# Altium PCB PCB layout.PcbDoc
Units mil, origin at the board's own origin, x right, y up, seen from the top; angles counter-clockwise.
Board outline 1995 x 1900 mil, 2 copper layers (Top Layer, Bottom Layer); 18 components, 21 nets, 82 pads, 0 vias.
Unrouted connection lines stored in the file: 1.
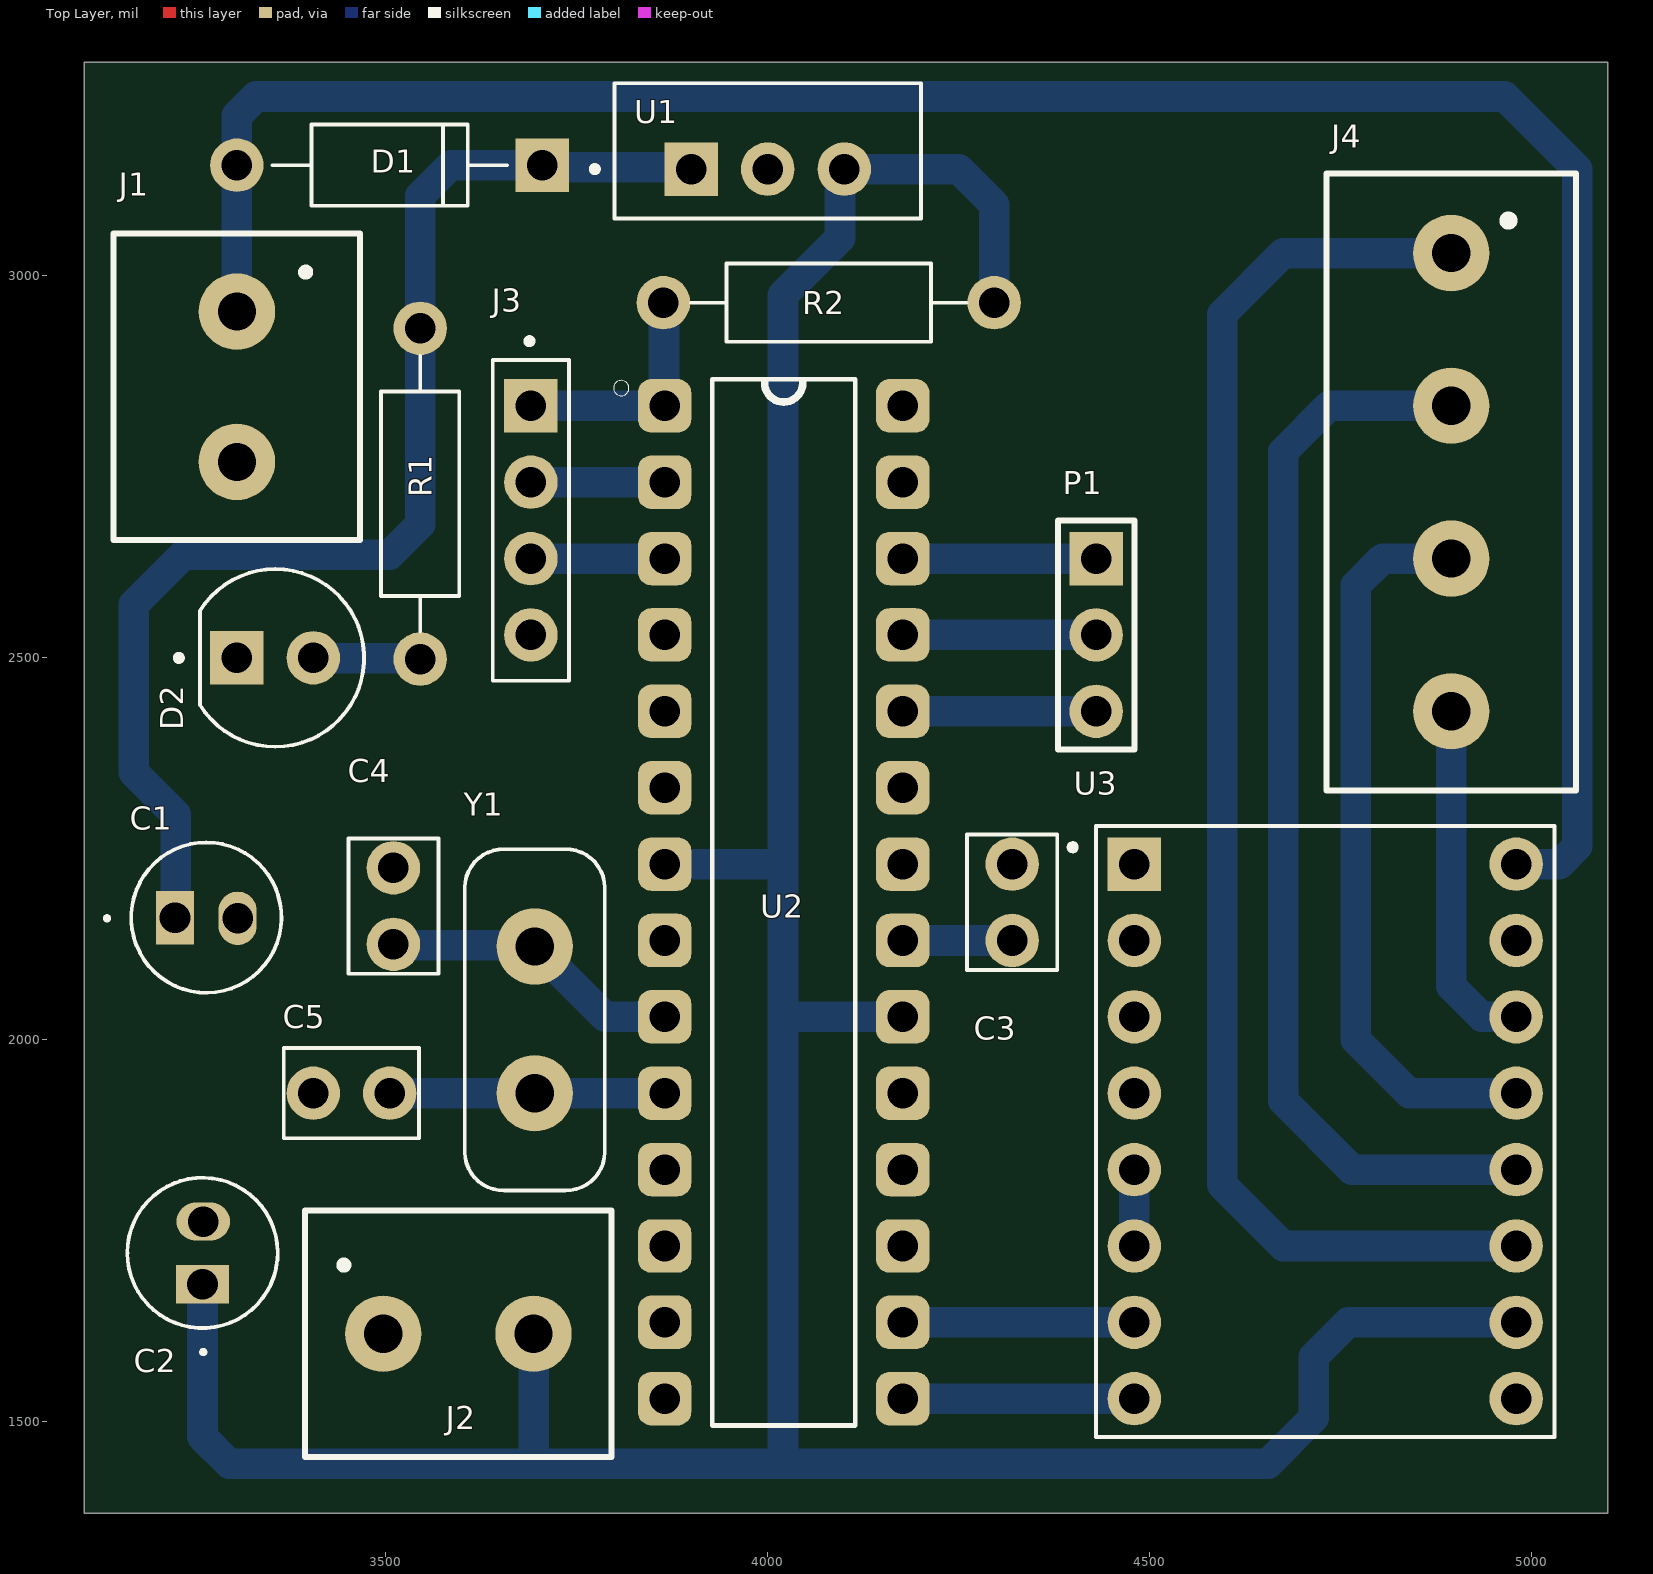
[diagram p0: Top Layer view]
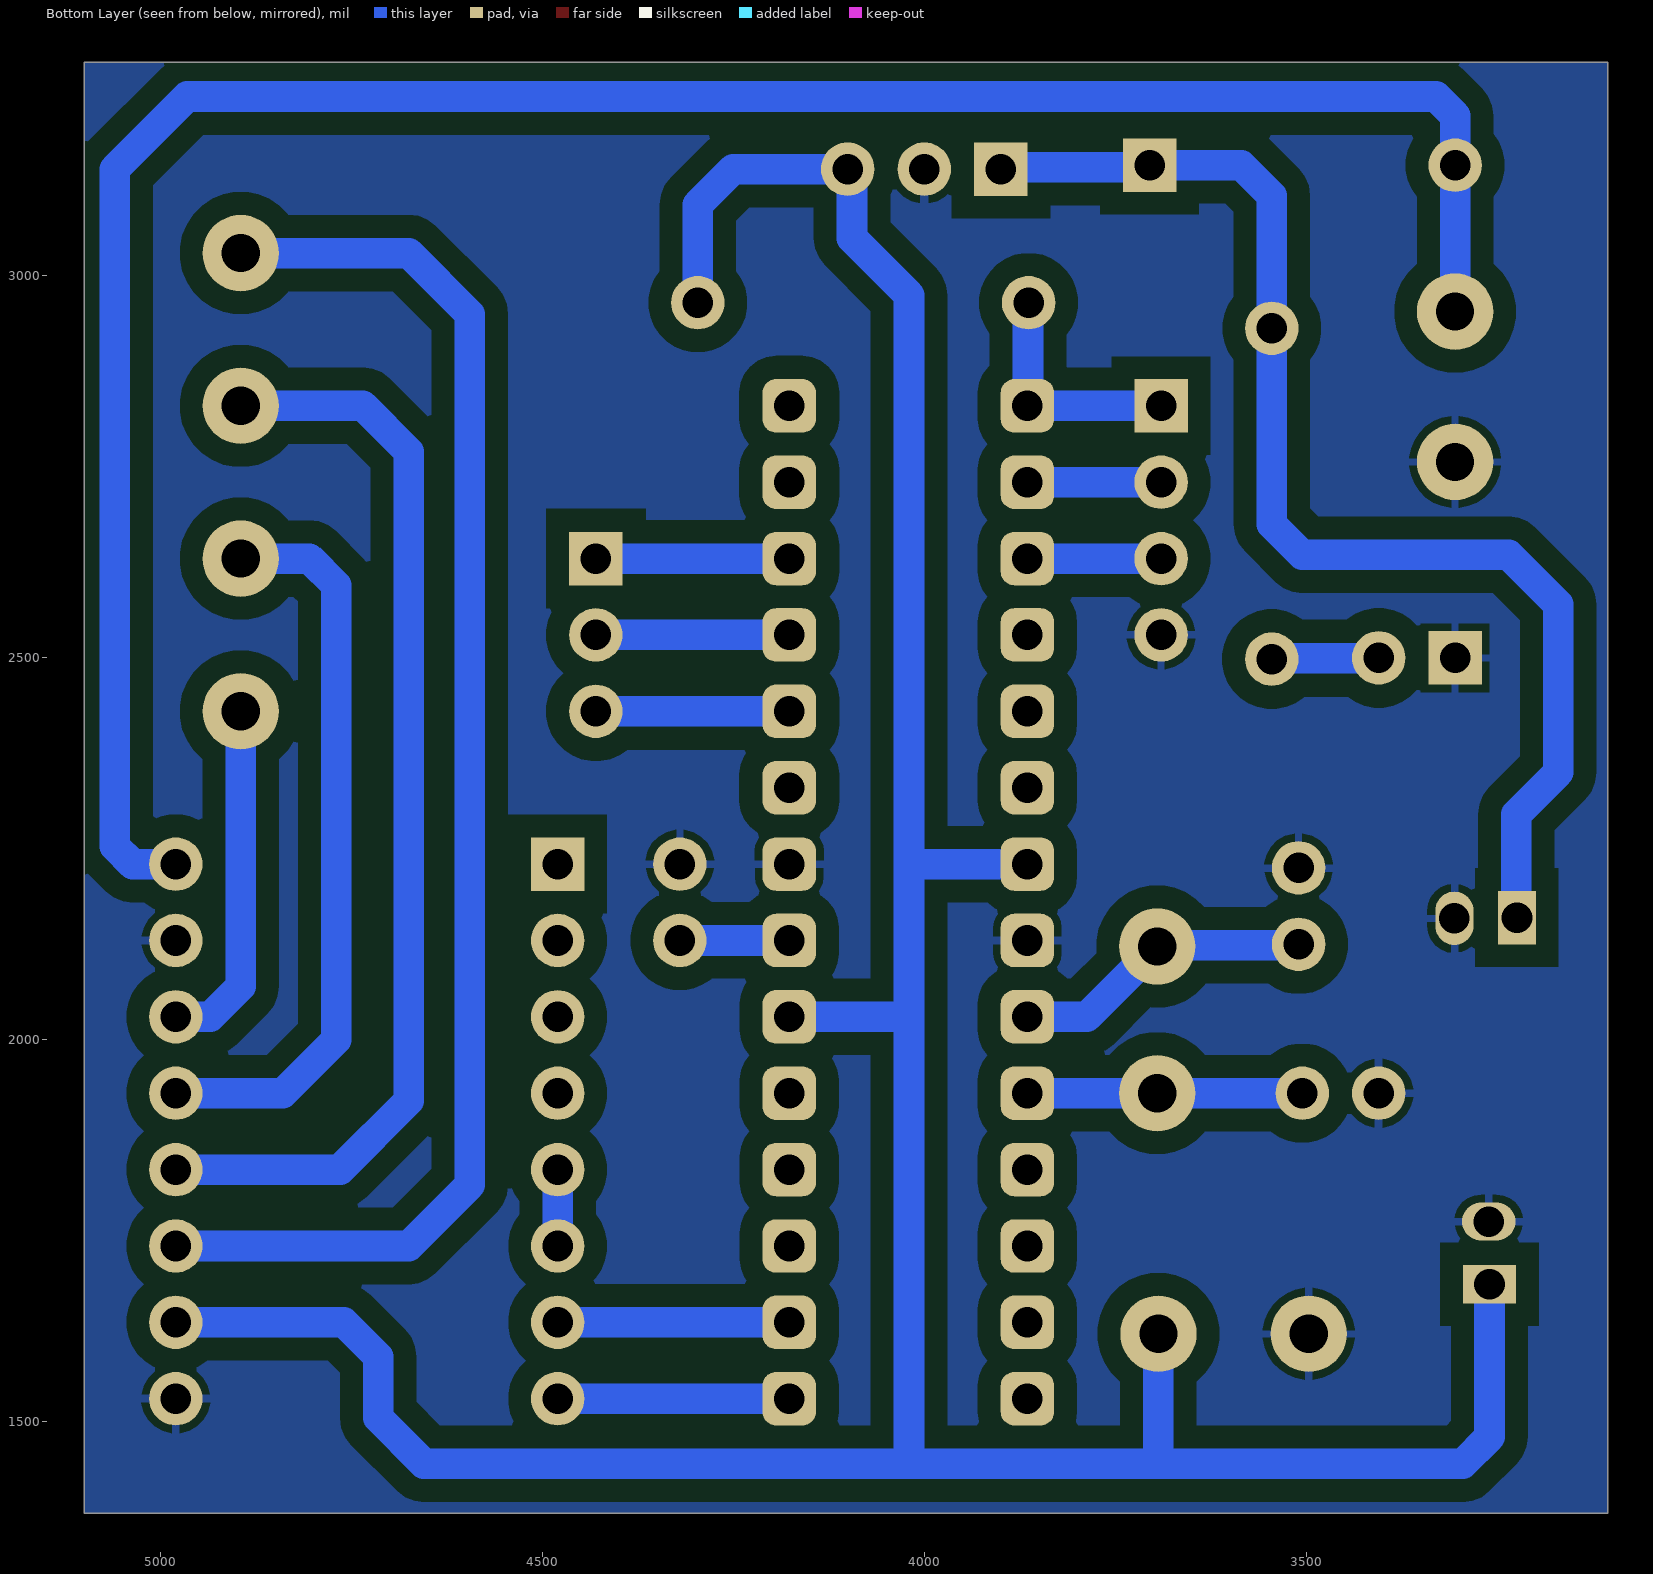
[diagram p1: Bottom Layer view, seen from below]
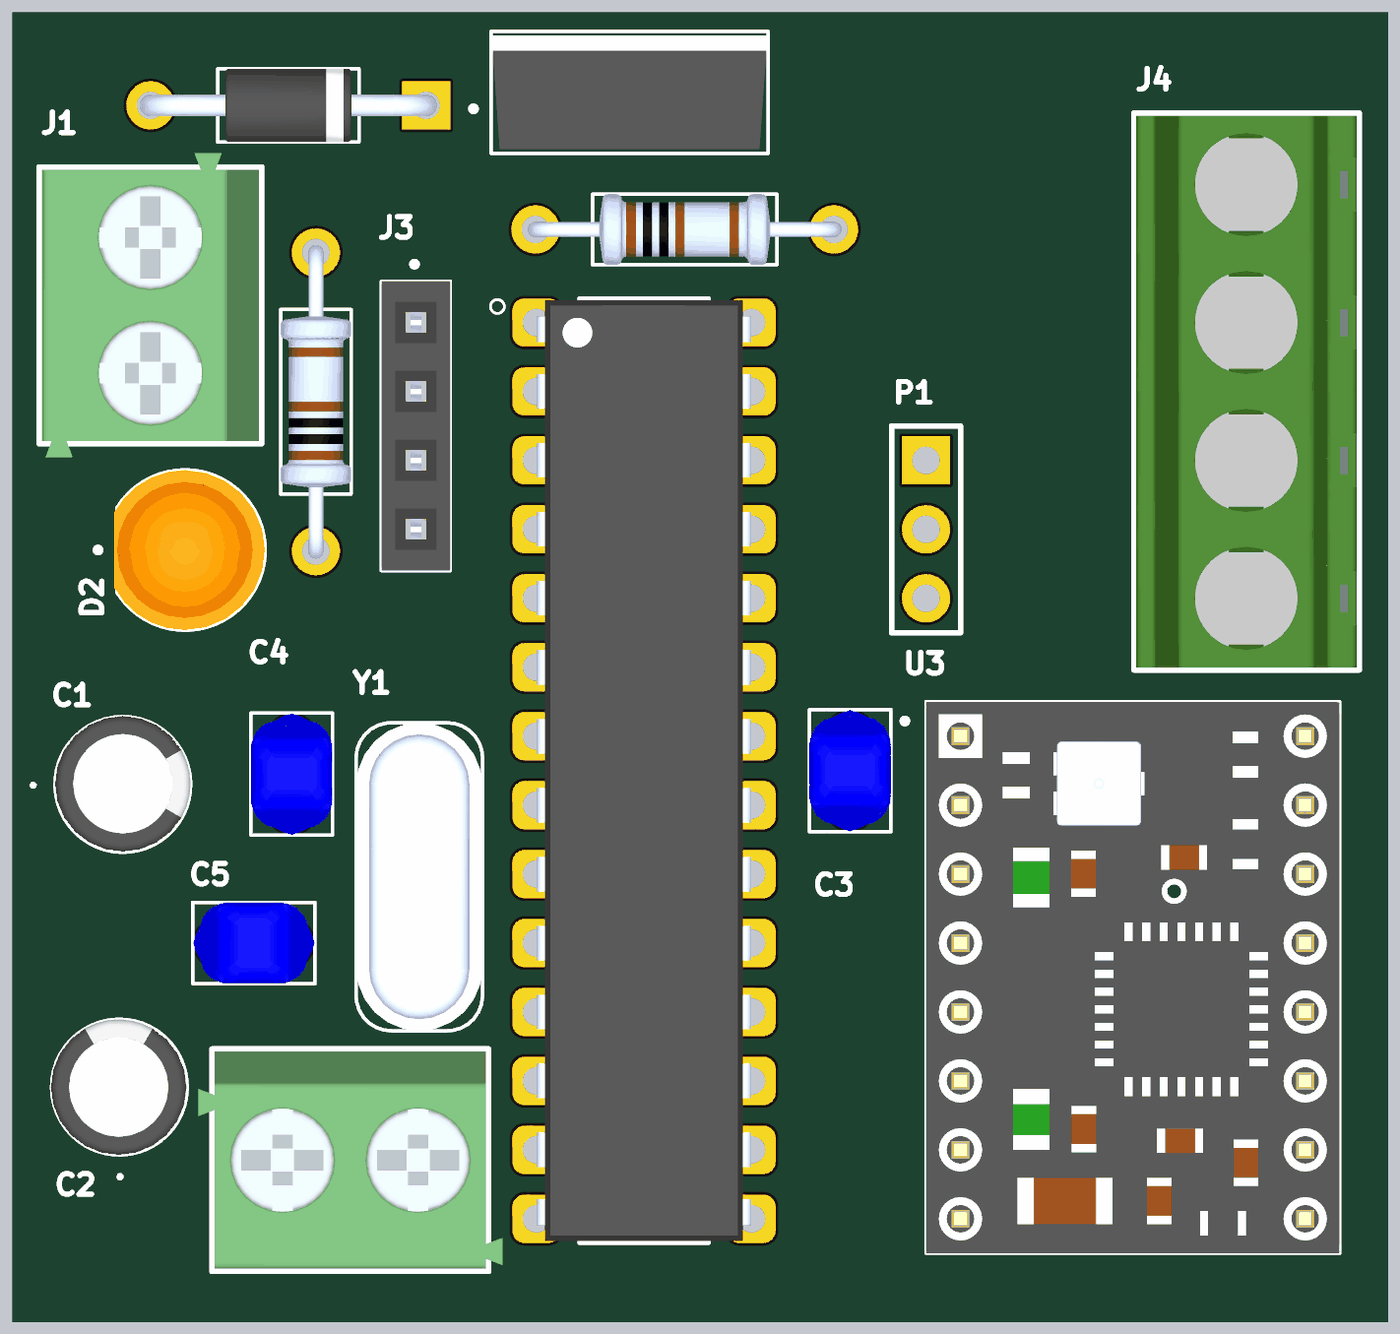
[diagram p2: 3D render of the assembled board from above, using the file's embedded part models]

## Layer stack, top to bottom
Top Solder: solder mask 0.4, Solder Resist, Dk 3.5
Top Layer: signal copper 1.4
Dielectric 1: dielectric 12.6, FR-4, Dk 4.8
Bottom Layer: signal copper 1.4
Bottom Solder: solder mask 0.4, Solder Resist, Dk 3.5

## Board outline
3105,1380 5100,1380 5100,3280 3105,3280

## Design rules (kind name [scope] priority, off if disabled: settings)
Clearance [All] p1: gap=30 ignorepadtopadclearanceinfootprint=FALSE
PolygonConnect [All] p1: connectstyle=Relief reliefconductorwidth=10 reliefentries=4 polygonreliefangle="90 Angle" airgapwidth=10
RoutingVias [All] p1: holewidth=40 width=70 viastyle="Through Hole" minholewidth=40 minwidth=70 maxholewidth=40 maxwidth=70
SolderMaskExpansion [All] p1: expansion=4 istentingtop=FALSE
Width [All] p1: maxlimit=60 minlimit=40 preferedwidth=50
30 further rules are at their usual default settings.

## Components (designator, comment, footprint, x,y, rotation, side; value= is the part's Value field where it differs from the comment)
C1 "100uF" CAPPRD500W50D500H1100 3265,2160 r0 top
C2 "10uF" CAPPRD500W50D500H1100 3260,1721 r90 top
C3 "100nF" CAPRB500W50L450T300H550 4320,2130 r90 top
C4 "22pF" CAPRB500W50L450T300H550 3510,2125 r90 top
C5 "22pF" CAPRB500W50L450T300H550 3505,1930 r180 top
D1 "1N4007" DIOAD1060W80L520D270 3505,3145 r180 top
D2 "L08R5000Q1" LEDRD254W57D500H1070 3355,2500 r0 top
J1 "691111710002" 691111710002 3305,2855 r270 top
J2 "691111710002" 691111710002 3595,1615 r0 top
J3 "PPTC041LFBN-RC" SULLINS_PPTC041LFBN-RC 3690,2680 r270 top
J4 "691241510004" 691241510004 4895,2730 r270 top
P1 "Header 3" HDR1X3 4430,2630 r270 top
R1 "1k" RESAD1100W55L680D260 3545,2715 r270 top
R2 "10k" RESAD1100W55L680D260 4080,2965 r180 top
U1 "LM7805" TO255P1020X450X1968-3 4000,3163.82 r0 top
U2 "ATMEGA328P-PU" DIP794W46P254L2967H457Q28B 4020.91,2180 r0 top
U3 "A4988" MODULE_A4988_STEPPER_MOTOR_DRIVER_CARRIER 4730,1880 r0 top
Y1 "16MHz" XTAL_ECS-160-20-4X 3695,2026.06 r270 top

## Footprints (in the part's own frame and the unit in brackets; to place one, negate y for a bottom-side part, rotate by r counter-clockwise, add the part's x,y. Pads: shape width x height; smd on the part's side, far side on the other; paste and mask are expansions set on the pad)
691111710002 [mm]
  round 2.54 hole 1.27: 1(-2.5,0) 2(2.5,0)
  silkscreen extent -5.1,-4.1 5.1,4.1, body extent -5.6,-4 5.6,4, height 11.01
691241510004 [mil]
  round 100 hole 50 mask+0: 1(-300,0) 2(-100,0) 3(100,0) 4(300,0)
  silkscreen extent -404,-163 404,163, body extent -400,-160 400,159, height 394
CAPPRD500W50D500H1100 [mil]
  oval 50x70 hole 40: N(41,-1)
  rect 50x70 hole 40: P(-41,0)
  silkscreen extent -131,-98 98,98, body extent -108,-97 108,99, height 434
CAPRB500W50L450T300H550 [mil]
  round 70 hole 40: 1(0,0) 2(100,0)
  silkscreen extent -39,-59 139,59, body extent -38,-59 138,59, height 210
DIOAD1060W80L520D270 [mil]
  round 70 hole 40: A(200,0)
  rect 70x70 hole 40: C(-200,0)
  silkscreen extent -154,-53 154,53, body extent -216,-53 216,53, height 99
DIP794W46P254L2967H457Q28B [mil]
  rrect50% 70x70 hole 40: 1(-155.91,650) 2(-155.91,550) 3(-155.91,450) 4(-155.91,350) 5(-155.91,250) 6(-155.91,150) 7(-155.91,50) 8(-155.91,-50) 9(-155.91,-150) 10(-155.91,-250) 11(-155.91,-350) 12(-155.91,-450) 13(-155.91,-550) 14(-155.91,-650) 15(155.91,-650) 16(155.91,-550) 17(155.91,-450) 18(155.91,-350) 19(155.91,-250) 20(155.91,-150) 21(155.91,-50) 22(155.91,50) 23(155.91,150) 24(155.91,250) 25(155.91,350) 26(155.91,450) 27(155.91,550) 28(155.91,650)
  silkscreen extent -223,-685 94,685, body extent -156,-682 156,683, height 180
HDR1X3 [mil] "Connector; Header; 3 Position"
  rect 70x70 hole 40: 1(0,0)
  round 70 hole 40: 2(100,0) 3(200,0)
  silkscreen extent -50,-50 250,50
LEDRD254W57D500H1070 [mil]
  round 70 hole 40: A(50,0)
  rect 70x70 hole 40: C(-50,0)
  silkscreen extent -130,-116 116,116, body extent -102,-116 116,116, height 358
MODULE_A4988_STEPPER_MOTOR_DRIVER_CARRIER [mil]
  rect 70x70 hole 40: 1(-250,350)
  round 70 hole 40: 2(-250,250) 3(-250,150) 4(-250,50) 5(-250,-50) 6(-250,-150) 7(-250,-250) 8(-250,-350) 9(250,-350) 10(250,-250) 11(250,-150) 12(250,-50) 13(250,50) 14(250,150) 15(250,250) 16(250,350)
  silkscreen extent -335,-400 300,400, body extent -300,-400 300,400, height 233
RESAD1100W55L680D260 [mil]
  round 70 hole 40: 1(-216.54,0) 2(216.54,0)
  silkscreen extent -180,-51 180,51, body extent -227,-51 227,51, height 101
SULLINS_PPTC041LFBN-RC [mil]
  rect 70x70 hole 40: 1(-150,0)
  round 70 hole 40: 2(-50,0) 3(50,0) 4(150,0)
  silkscreen extent -239,-50 210,50, body extent -210,-50 210,50, height 335
TO255P1020X450X1968-3 [mil]
  rect 70x70 hole 40: 1(-100.39,-23.82)
  round 70 hole 40: 2(0,-23.82) 3(100.39,-23.82)
  silkscreen extent -230,-89 201,89, body extent -200,-82 200,83, height 901
XTAL_ECS-160-20-4X [mm]
  round 2.54 hole 1.27: 1(-2.44,0) 2(2.44,0)
  silkscreen extent -5.68,-2.33 5.68,2.33, body extent -5.68,-2.32 5.68,2.32, height 3.5

## Part data
C1 C2: library part "Electrolytic capacitor", "FS-A", Package=None, Availability=Unavailable, MF="{'manufacturer': u'Panasonic'}", MP=EEUFS0J221B, Price=None
C3 C4 C5: library part "Ceramic capacitor", "2200 pF Â±10% 250V Ceramic Capacitor X7R Radial", Package="Radial TDK", Check_prices=https://www.snapeda.com/parts/FG24X7R2E222KNT06/TDK/view-part/?ref=eda, Digi-Key_Part_Number=445-173386-1-ND, MF=TDK, MP=FG24X7R2E222KNT06, Purchase-URL=https://pricing.snapeda.com/search/part/FG24X7R2E222KNT06/?ref=eda, SnapEDA_Link=https://www.snapeda.com/parts/FG24X7R2E222KNT06/TDK/view-part/?ref=snap
D1: "Diode Switching 1KV 1A 2-Pin DO-41", Package=None, Availability=Unavailable, MP=1N4007, Price=None
D2: library part LED, "LED, Orange, Through Hole, T-1 3/4 (5mm), 30 mA, 2.1 V, 635 nm", Package=None, Availability=Unavailable, MF="{'manufacturer': u'LED Technology'}", MP=L08R5000Q1, Price=None
J1 J2: library part "Terminal Block - 2Pins", "2 Position Wire to Board Terminal Block Horizontal with Board 0.197 _5.00mm_ Through Hole", Package=None, Availability=Unavailable, MF="Wurth Electronics", MP=691111710002, Price=None, SnapEDA_Link=https://www.snapeda.com/parts/691111710002/Wurth%20Electronics%20Inc./view-part/1195092/?ref=snap
J3: library part "Female header - 4Pins", "4 Position Header Connector Through Hole", Package=None, Availability=Warning, Check_prices=https://www.snapeda.com/parts/PPTC041LFBN-RC/Sullins%20Connector%20Solutions/view-part/285917/?ref=eda, MF="Sullins Connector", MP=PPTC041LFBN-RC, Price=None, Purchase-URL=https://pricing.snapeda.com/search/part/PPTC041LFBN-RC/?ref=eda, SnapEDA_Link=https://www.snapeda.com/parts/PPTC041LFBN-RC/Sullins%20Connector%20Solutions/view-part/285917/?ref=snap
J4: library part "Terminal block - 4Pins", "<b>WR-TBL Serie 2415 - 5.08 mm Horizontal Entry Modular w. Rising Cage Clamp</b> <br> <br><b> KIND PROPERTIES </b> <br><br> Pitch 5.08 mm  <br> <br> <b>MATERIAL PROPERTIES </b> <br> <br>Insulator Material PA66  <br>Insulator Flammability Rating UL94 V-0  <br>Terminal Screw Material Steel  <br>Terminal Screw Plating Zinc  <br>Wire Guard Material Copper Alloy  <br> <br> <b>GENERAL INFORMATION </b> <br> <br>Operating Temperature -30 up to +120 Â°C  <br>Compliance ROHS & Reach  <br><br> <b>ELECTRICAL PROPERTIES </b> <br> <br>IR UL 14 A  <br>IR VDE 24 A  <br>Working Voltage [UL] 300 V (AC)  <br>Working Voltage [VDE] 250 V (AC)  <br>Withstanding Voltage [UL] 1600 V (AC)  <br>Withstanding Voltage [VDE] 2000 V (AC)  <br>Contact Resistance 20 mÎ©  <br> <br> <b>MECHANICAL PROPERTIES </b> <br> <br>Wire Strip Length 6  <br>Screw M3  <br> <br> <b>CERTIFICATION </b> <br> <br>UL Approval E150931  <br>VDE Approval 40021365  <br> <br> <b>PACKAGING PROPERTIES </b> <br> <br>Packaging Box  <br> <br> <br><a href=\"https://www.we-online.com/catalog/media/o79416v209%20Family_WR-TBL_6912427000xx_6912425000xx.jpg\" title=\"Enlarge picture\"> <img src=\"https://www.we-online.com/catalog/media/o79416v209%20Family_WR-TBL_6912427000xx_6912425000xx.jpg\" width=\"320\"></a><p> Details see: <a href=\"https://www.we-online.com/catalog/en/TBL_5_08_2415_HORIZONTAL_ENTRY_W_RISING_CAGE_6912415100xx/\">https://www.we-online.com/catalog/en/TBL_5_08_2415_HORIZONTAL_ENTRY_W_RISING_CAGE_6912415100xx/</a><p>  </b>Updated by Ella Wu  2019-11-26<br> </b>2019(C) Wurth Elektronik", Package=None, Availability="In Stock", Check_prices=https://www.snapeda.com/parts/691241510004/Wurth+Electronics+Inc./view-part/?ref=eda, MF="WÃ¼rth Elektronik", MP=691241510004, Price=None, Purchase-URL=https://pricing.snapeda.com/search/part/691241510004/?ref=eda, SnapEDA_Link=https://www.snapeda.com/parts/691241510004/Wurth+Electronics+Inc./view-part/?ref=snap
P1: "Header, 3-Pin", LatestRevisionDate=17-Jul-2002, LatestRevisionNote="Re-released for DXP Platform.", Publisher="Altium Limited"
R1 R2: library part "Resistor (0.25W)", "(MFR-25FBF52-10K) 10,2 kOhm bei 1% 0,25W, 1/4W Durchbohrlochwiderstand Axial Metal Film", Package="Axial Yageo", Digi-Key_Part_Number=10.2KXBK-ND, MF=Yageo, MP=MFR-25FBF52-10K, Purchase-URL=https://pricing.snapeda.com/search/part/MFR-25FBF52-10K/?ref=eda, SnapEDA_Link=https://www.snapeda.com/parts/MFR-25FBF52-10K/Yageo/view-part/424333/?ref=snap
U1: library part LM78__, Package=None, Availability=Unavailable, MP=LM7805CT/NOPB, Price=None
U2: "ATmega Series 20 MHz 32 KB Flash 2 KB SRAM 8-Bit Microcontroller - DIP-28", Package=None, Availability=Unavailable, MP=ATMEGA328P-PU, Price=None
U3: library part A4988_STEPPER_MOTOR_DRIVER_CARRIER, "Stepper motor controler; IC: A4988; 1A; Uin mot: 8Ã·35V", Package=None, Availability=Unavailable, MP=A4988_STEPPER_MOTOR_DRIVER_CARRIER, Price=None
Y1: library part "Crystal oscilator", "CRYSTAL T/H", Package=None, Availability=Unavailable, MF="{'manufacturer': u'ECS Inc.'}", MP=ECS-160-S-4, Price=None

## Nets (pads, with @x,y where several pads share a name; then routed paths per layer and width w, separated by ;. In a path a pad name is that pad's centre, name@x,y a point inside that pad or via, vN(x,y) a via of type N, cw(c..) or ccw(c..) an arc to the next point about the centre after c; other vN are vias at no path point)
+12: D1.A J1.1 U3.16 | length 3037.6
  Bottom Layer w40: J1.1 D1.A 3305,3210 3330,3235 4965,3235 5060,3140 5060,2253.43 5036.57,2230 U3.16
dir: U2.15 U3.8 | length 303.2
  Bottom Layer w40: U2.15 U3.8
GND: C1.N C2.N C3.2 C4.2 C5.2 D2.C J1.2 J2.1 J3.4 U1.2 U2.8 U2.22 U3.9 U3.15
NetC1_P: C1.P D1.C R1.1 U1.1 | length 1654.9
  Bottom Layer w40: C1.P 3225,2161 3225,2295 3170,2350 3170,2570 3235,2635 3505,2635 3545,2675 R1.1 3545,3105 3585,3145 D1.C 3707.5,3142.5 3897.11,3142.5 U1.1
NetC3_1: C3.1 U2.21 | length 143.2
  Bottom Layer w40: U2.21 C3.1
NetD2_A: D2.A R1.2 | length 140.6
  Bottom Layer w40: D2.A 3405.77,2499.23 3544.23,2499.23 R1.2
NetJ4_1: J4.1 U3.11 | length 1891.3
  Bottom Layer w40: J4.1 4675,3030 4595,2950 4595,1810 4675,1730 U3.11
NetJ4_2: J4.2 U3.12 | length 1437.1
  Bottom Layer w40: J4.2 4735,2830 4675,2770 4675,1920 4765,1830 U3.12
NetJ4_3: J4.3 U3.13 | length 973.5
  Bottom Layer w40: J4.3 4805,2630 4770,2595 4770,2000 4840,1930 U3.13
NetJ4_4: J4.4 U3.14 | length 461.6
  Bottom Layer w40: J4.4 4895,2070 4935,2030 U3.14
NetP1_1: P1.1 U2.26 | length 253.2
  Bottom Layer w40: U2.26 P1.1
NetP1_2: P1.2 U2.25 | length 253.2
  Bottom Layer w40: U2.25 P1.2
NetP1_3: P1.3 U2.24 | length 253.2
  Bottom Layer w40: U2.24 P1.3
NetU3_5: U3.5 U3.6 | length 100
  Bottom Layer w40: U3.6 U3.5
reset: J3.1 R2.2 U2.1 | length 310.6
  Bottom Layer w40: J3.1 U2.1 3864.23,2830.77 3864.23,2964.23 R2.2
rx: J3.3 U2.3 | length 175
  Bottom Layer w40: J3.3 U2.3
step: U2.16 U3.7 | length 303.2
  Bottom Layer w40: U2.16 U3.7
tx: J3.2 U2.2 | length 175
  Bottom Layer w40: J3.2 U2.2
VCC: C2.P J2.2 R2.1 U1.3 U2.7 U2.20 U3.10 | length 4622
  Bottom Layer w40: C2.P 3260,1480 3295,1445 3700,1445 ; J2.2 3693.43,1451.57 3700,1445 ; U2.7 4012.5,2230 4020,2237.5 ; U2.20 4030,2030 4020,2040 ; R2.1 4296.54,3093.46 4250,3140 U1.3 4094.65,3134.26 4094.65,3049.65 4020,2975 4020,2237.5 ; U3.10 4760,1630 4715,1585 4715,1505 4655,1445 4020,1445 ; 3700,1445 4020,1445 ; 4020,1445 4020,2040 ; 4020,2040 4020,2237.5
xtal1: C4.1 U2.9 Y1.1 | length 394.4
  Bottom Layer w40: C4.1 3511.44,2123.56 3693.56,2123.56 Y1.1 3787.13,2030 U2.9
xtal2: C5.1 U2.10 Y1.2 | length 360
  Bottom Layer w40: C5.1 Y1.2 U2.10
pads on no net: U2.4 U2.5 U2.6 U2.11 U2.12 U2.13 U2.14 U2.17 U2.18 U2.19 U2.23 U2.27 U2.28 U3.1 U3.2 U3.3 U3.4

## Polygon pours and split planes (outlines as drawn)
GND on Bottom Layer "GND_L02_P000" (solid, pour order 0): 3105,3280 3105,1380 5100,1380 5100,3280